# Altium PCB UAVCAN LIDAR.PcbDoc (part 2 of 2)
Units mm, origin at the board's own origin, x right, y up, seen from the top; angles counter-clockwise.
Board outline 36.2 x 66.55 mm, 2 copper layers (Top Layer, Bottom Layer); 103 components, 64 nets, 316 pads, 230 vias.
Unrouted connection lines stored in the file: 2.
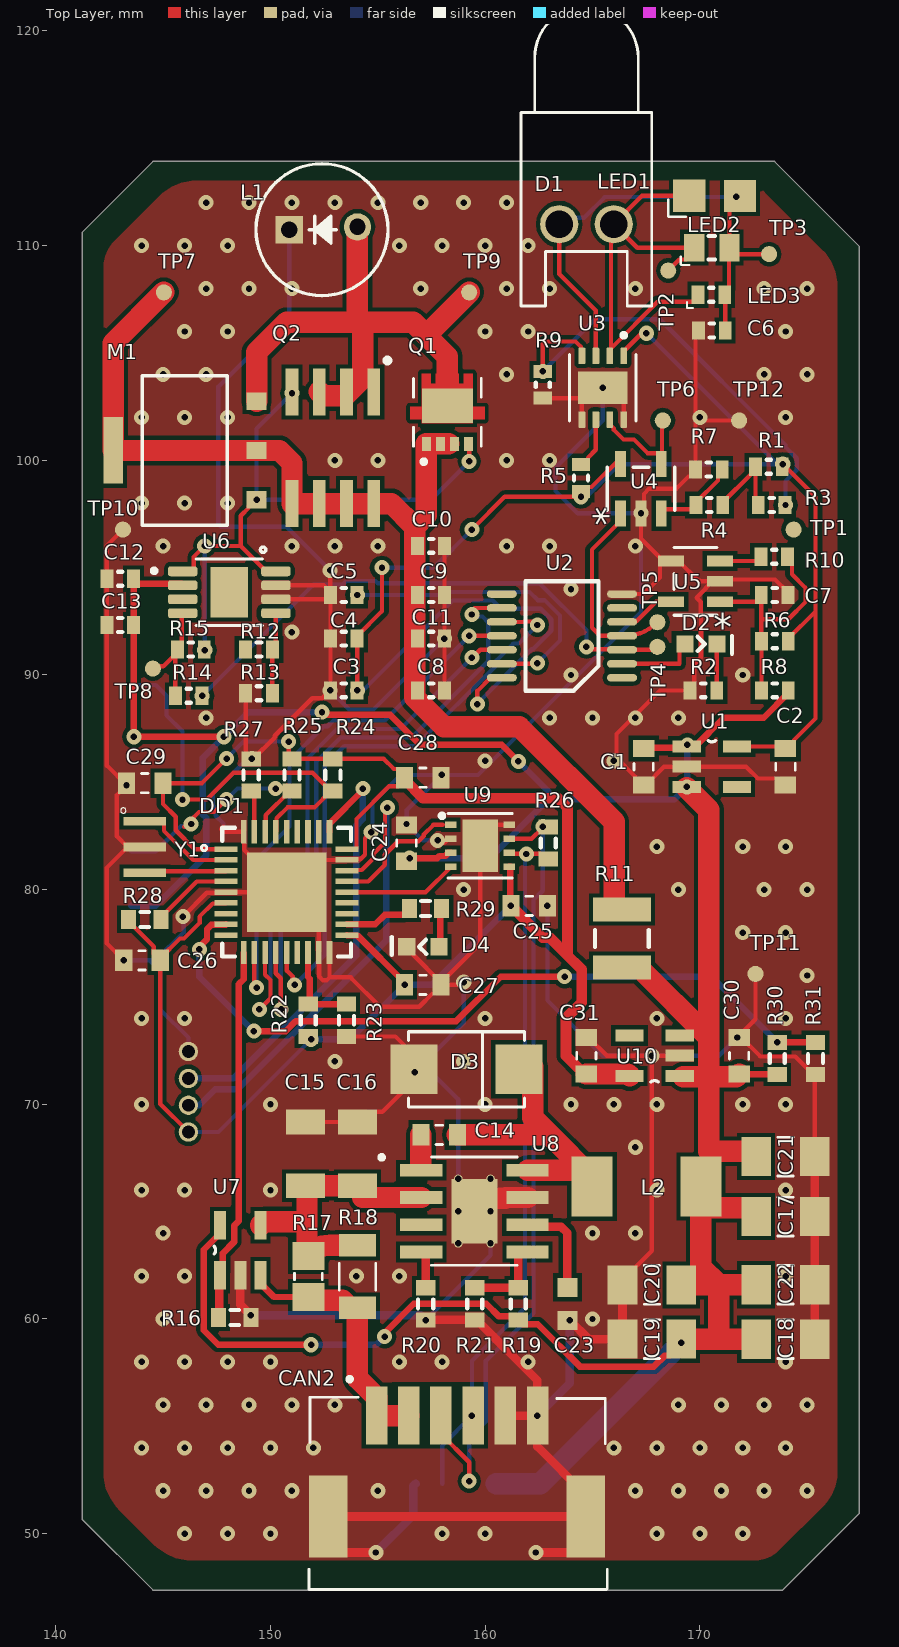
[diagram p0: Top Layer view]

## Polygon pours and split planes (outlines as drawn)
GND on Bottom Layer "GND_L02_P002" (solid, remove dead copper, pour order 2): 172.847,112.522 ccw(c171.314,110.989) 171.314,113.157 146.34,113.157 ccw(c146.34,110.617) 144.544,112.413 142.494,110.363 ccw(c143.72,109.137) 141.986,109.137 141.986,52.995 ccw(c144.526,52.995) 142.73,51.199 144.29,49.639 ccw(c146.086,51.435) 146.086,48.895 172.339,48.895 ccw(c172.339,50.428) 173.423,49.344 175.514,51.435 ccw(c173.981,52.968) 176.149,52.968 176.149,108.168 ccw(c173.609,108.168) 175.405,109.964
GND on Top Layer "GND_L01_P000" (solid, remove dead copper, pour order 0): 173.101,112.395 ccw(c171.568,110.862) 171.568,113.03 146.594,113.03 ccw(c146.594,110.49) 144.798,112.286 142.748,110.236 ccw(c143.974,109.01) 142.24,109.01 142.24,52.868 ccw(c144.78,52.868) 142.984,51.072 144.544,49.512 ccw(c146.34,51.308) 146.34,48.768 172.593,48.768 ccw(c172.593,50.301) 173.677,49.217 175.768,51.308 ccw(c174.235,52.841) 176.403,52.841 176.403,108.041 ccw(c173.863,108.041) 175.659,109.837

## Silkscreen, mask and mechanical layers (free items; w line width, h text height)
Dimensions:
  the board outline again, w0.4

## Text inside footprints (layer, text, board x,y; h text height)
U4: Top Overlay "*" at 166.313,96.957 h1.27 r90; Mechanical 13 "*" at 166.821,97.741 h1.27 r90
U5: Top Overlay "*" at 171.521,93.415 h1.27 r180; Mechanical 13 "*" at 170.737,93.923 h1.27 r180